# Altium PCB whirlygig.PcbDoc
Units mm, origin at the board's own origin, x right, y up, seen from the top; angles counter-clockwise.
Board outline 40 x 27.5 mm, 2 copper layers (Top Layer, Bottom Layer); 35 components, 48 nets, 275 pads, 46 vias.
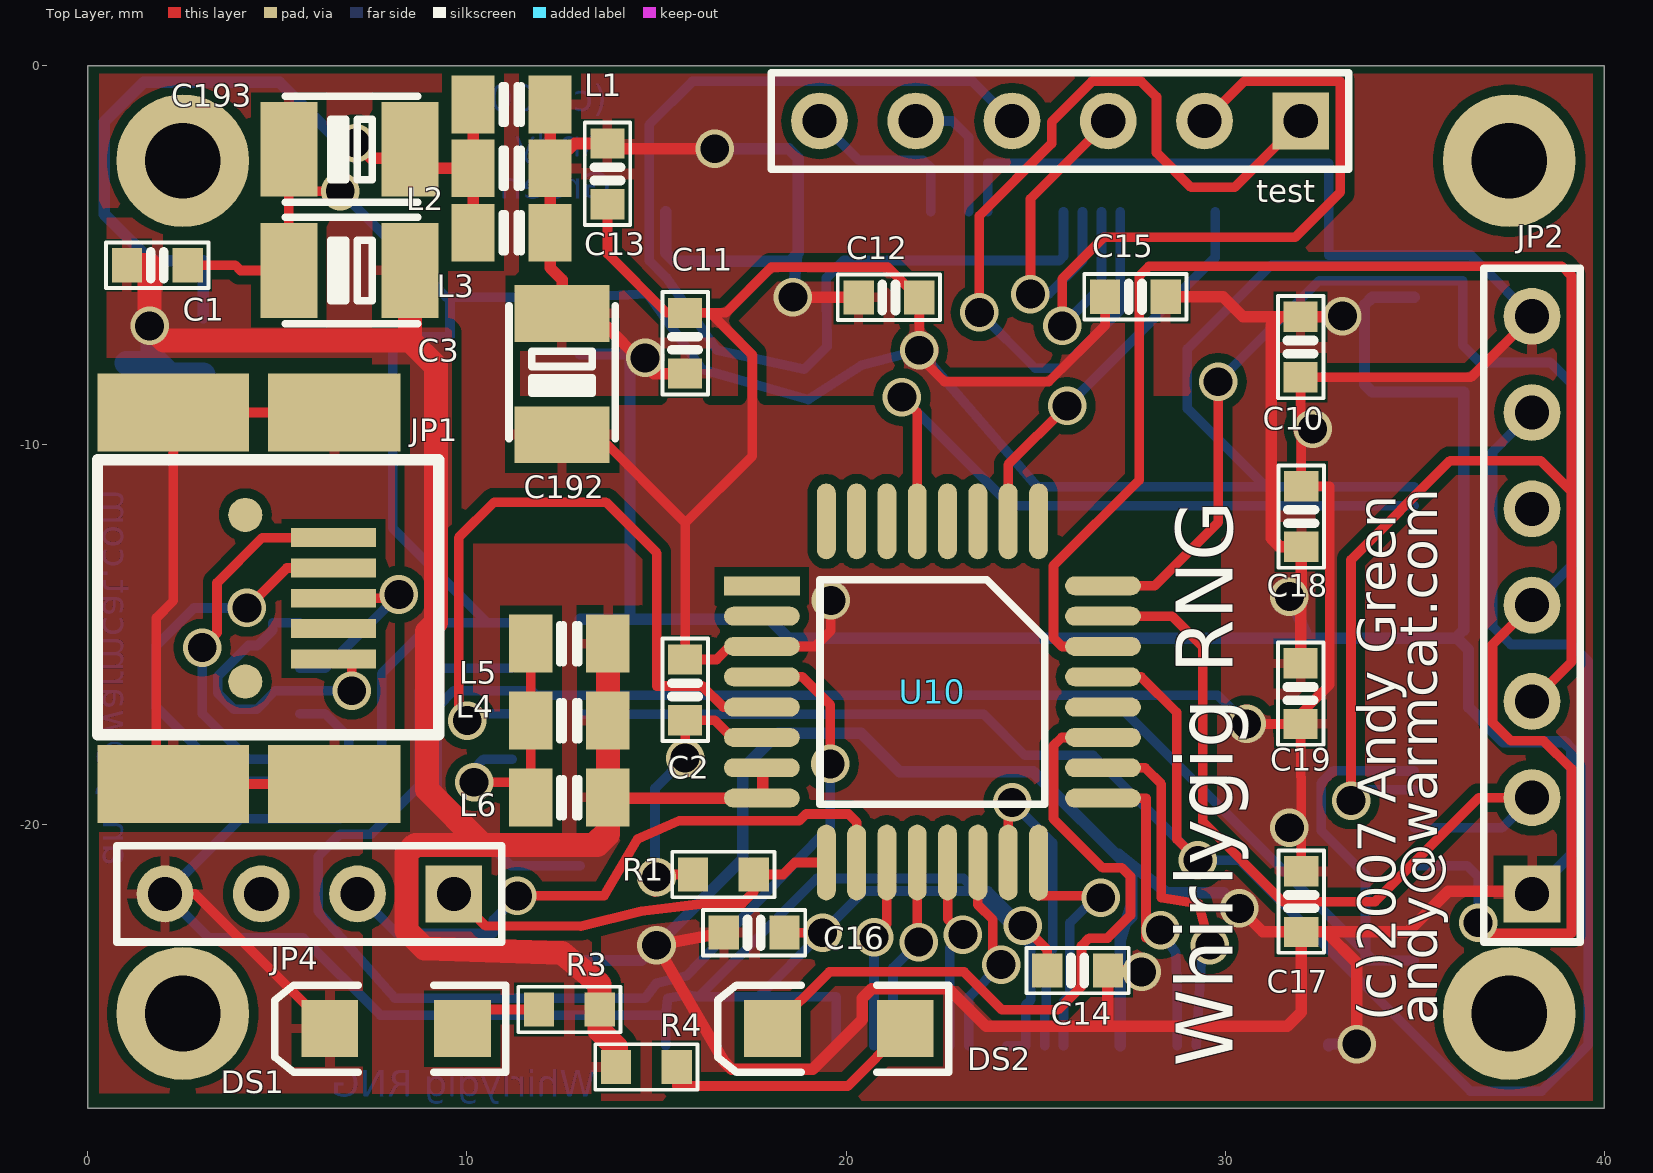
[diagram p0: Top Layer view]
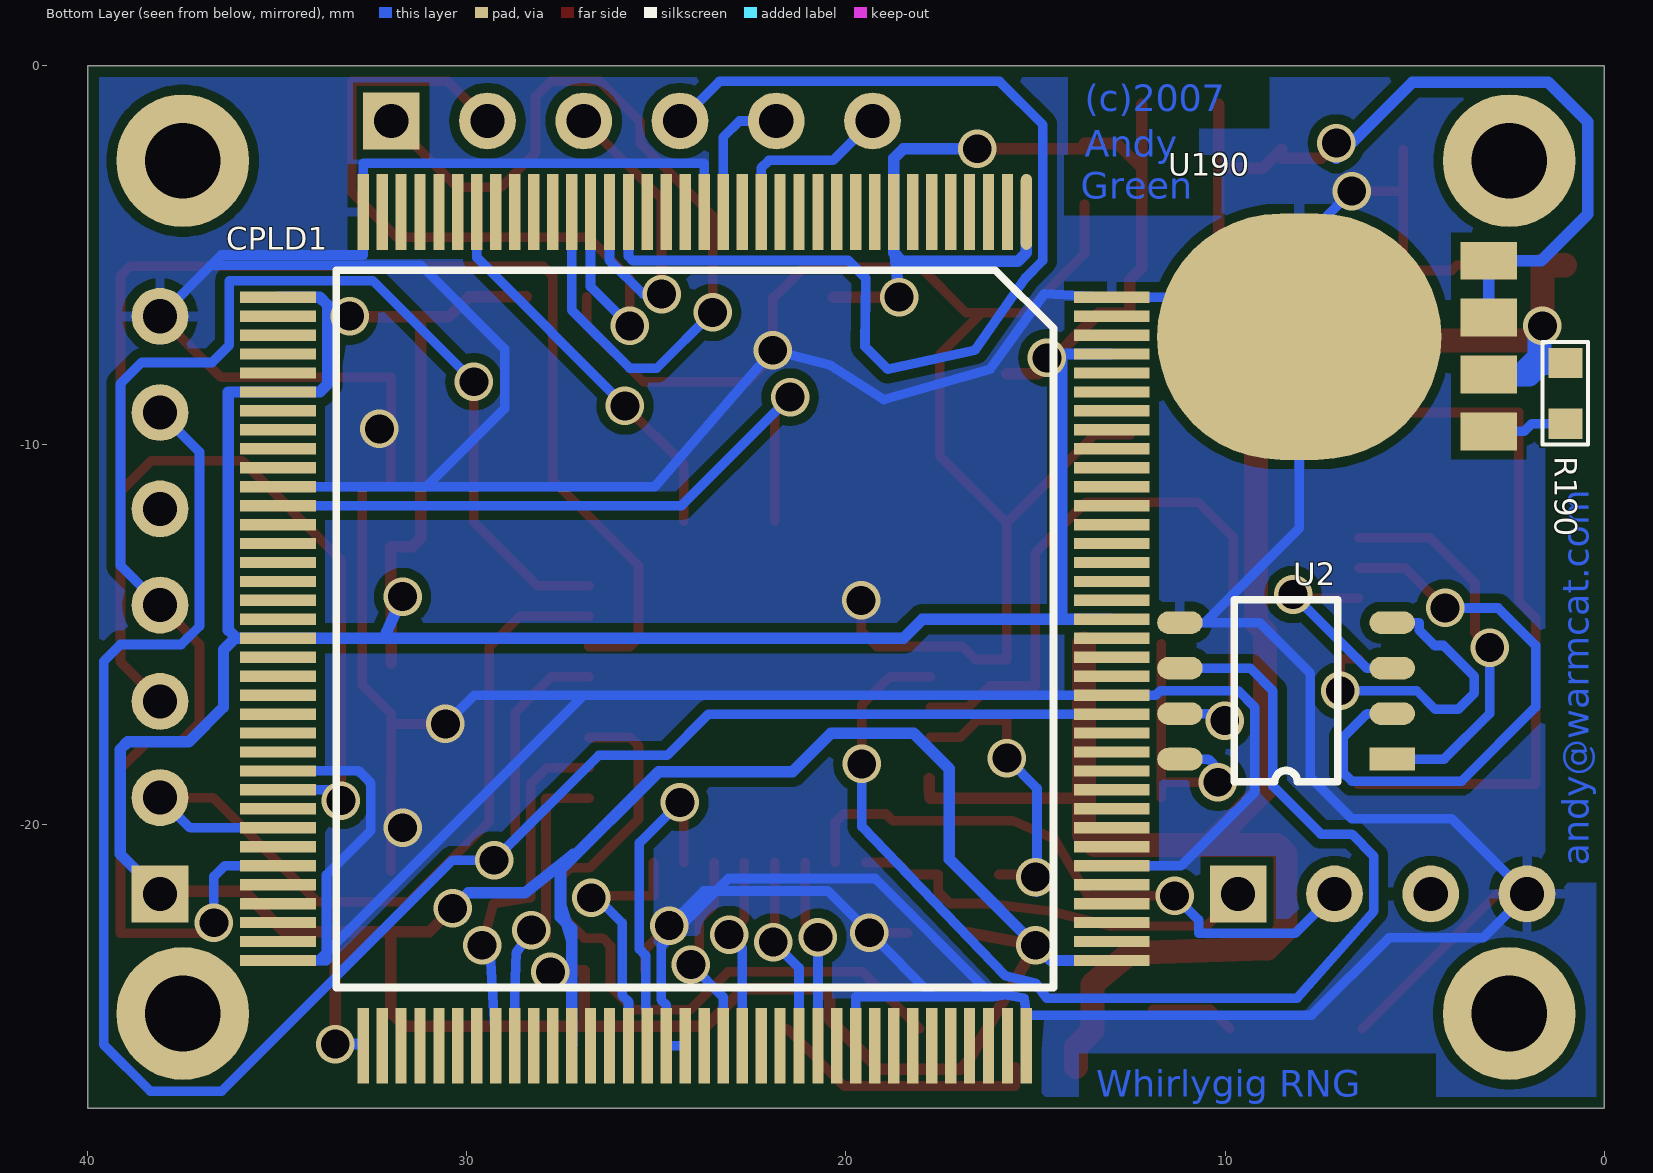
[diagram p1: Bottom Layer view, seen from below]

## Layer stack, top to bottom
Top Layer: signal copper 0.0356
Dielectric: dielectric 0.32, FR-4, Dk 4.8
Bottom Layer: signal copper 0.0356

## Board outline
0,-27.5 40,-27.5 40,0 0,0

## Design rules (kind name [scope] priority, off if disabled: settings)
Clearance Clearance_plane [(InPoly)] p1: gap=0.254
Clearance [All] p2: gap=0.152
ComponentClearance [All] p1: gap=0.152 collisioncheckmode=2 verticalgap=0.152
HoleSize [All] p1: absolutevalues=TRUE maxlimit=4 minlimit=0.025 maxpercent=80.000 minpercent=20.000
PolygonConnect [All] p1: connectstyle=Relief reliefconductorwidth=0.254 reliefentries=4 polygonreliefangle="90 Angle"
RoomDefinition randy [InComponentClass('randy')] p1: confinementstyle=ConfineIn formatcopy=TRUE lockcomponents=FALSE outline 0,-27.6 40.1,-27.6 40.1,0 0,0
RoutingVias [All] p1: holewidth=0.762 width=1.016 viastyle="Through Hole" minholewidth=0.762 minwidth=1.016 maxholewidth=0.762 maxwidth=1.016
SMDNeckDown [All] p1: percent=100.000
SolderMaskExpansion [All] p1: expansion=0.102
TestPointUsage [All] p1: valid=0 allowmultiple=FALSE
Testpoint [All] p1: side=15 testpointundercomponent=TRUE minsize=1.016 maxsize=2.54 preferedsize=1.524 minholesize=0 maxholesize=1.016 preferedholesize=0.813 testpointgrid=0.025 style=1023 order=0123456789
Width "Schematic Width Constraint" [InNet('3.3V')] p1: maxlimit=0.305 minlimit=0.152 preferedwidth=0.305
Width "Schematic Width Constraint_1" [InNet('3.3VBEFOREIND')] p2: maxlimit=0.305 minlimit=0.152 preferedwidth=0.305
Width "Schematic Width Constraint_2" [InNet('VBUSIN')] p3: maxlimit=0.635 minlimit=0.152 preferedwidth=0.635
Width [All] p4: maxlimit=0.254 minlimit=0.254 preferedwidth=0.254
16 further rules are at their usual default settings.

## Components (designator, comment, footprint, x,y, rotation, side; value= is the part's Value field where it differs from the comment)
C1 "100n" C0603 1.016,-5.25 r0 top
C2 "100n" C0603 15.748,-17.272 r90 top
C3 "10u" TAJ-T 6.9,-6.096 r180 top
C10 "100n" C0603 32.004,-6.604 r270 top
C11 "100n" C0603 15.748,-8.128 r90 top
C12 "100n" C0603 20.32,-6.096 r0 top
C13 "100n" C0603 13.716,-2.032 r270 top
C14 "100n" C0603 26.924,-23.876 r180 top
C15 "100n" C0603 28.448,-6.096 r180 top
C16 "100n" C0603 16.764,-22.86 r0 top
C17 "100n" C0603 32.004,-22.86 r90 top
C18 "100n" C0603 32.004,-12.7 r90 top
C19 "100n" C0603 32.004,-15.748 r270 top
C192 "47uF 6V3 TANT" TAJ-T 13.208,-8.128 r270 top
C193 "47uF 6V3 TANT" TAJ-T 6.9,-2.9 r180 top
CPLD1 "XC95288XLTQ144" TQFP144 15.24,-3.85 r270 bottom
DS1 "LED2" DSO-F2/D6.1 8.128,-25.4 r180 top
DS2 "LED2" DSO-F2/D6.1 19.812,-25.4 r180 top
JP1 "Header 9" USBSKT5MIN 2.25,-9.144 r0 top
JP2 "Header 7" HDR1X7 38.1,-21.844 r90 top
JP4 "Header 4" HDR1X4 9.652,-21.844 r180 top
L1 "742792093" C0805 11.176,-1.016 r180 top
L2 "742792093" C0805 11.176,-2.7 r180 top
L3 "742792093" C0805 11.176,-4.4 r180 top
L4 "742792093" C0805 12.7,-17.272 r0 top
L5 "742792093" C0805 12.7,-15.24 r0 top
L6 "742792093" C0805 12.7,-19.304 r0 top
R1 "10K" R0603 16.764,-21.336 r0 top
R3 "470R" R0603 12.7,-24.892 r180 top
R4 "330R" R0603 14.732,-26.416 r0 top
R190 "10K" R0603 1.016,-8.636 r90 bottom
test "HEADER 6" HDR1X6 32,-1.45 r180 top
U2 "USB6B1" SOP8USB 5.588,-18.288 r0 bottom
U10 "C8051F320" LQFP32 17.78,-13.716 r270 top
U190 "LP3964EMP-3.3" SOT-223-5 3.048,-9.652 r90 bottom

## Footprints (in the part's own frame and the unit in brackets; to place one, negate y for a bottom-side part, rotate by r counter-clockwise, add the part's x,y. Pads: shape width x height; smd on the part's side, far side on the other; paste and mask are expansions set on the pad)
C0603 [mm]
  rect 0.8x0.9 smd: 1(0.013,-0.008) 2(1.613,-0.008)
  silkscreen extent -0.54,-0.61 2.16,0.59
C0805 [mil]
  rect 45x60 smd: 1(-40,0) 2(40,0)
  silkscreen extent -10,-20 10,20
DSO-F2/D6.1 [mm] "SMT LED; 2 Flat Leads"
  rect 1.5x1.5 smd: 1(-1.75,0) 2(1.75,0)
  silkscreen extent -2.9,-1.15 3.2,1.15
HDR1X4 [mm] "Connector; Header; 4 Position"
  rect 1.5x1.5 hole 0.9: 1(0,0)
  round 1.5 hole 0.9: 2(2.54,0) 3(5.08,0) 4(7.62,0)
  silkscreen extent -1.27,-1.27 8.89,1.27
HDR1X6 [mm] "Connector; Header; 6 Position"
  rect 1.5x1.5 hole 0.9: 1(0,0)
  round 1.5 hole 0.9: 2(2.54,0) 3(5.08,0) 4(7.62,0) 5(10.16,0) 6(12.7,0)
  silkscreen extent -1.27,-1.27 13.97,1.27
HDR1X7 [mm] "Connector; Header; 7 Position"
  rect 1.5x1.5 hole 0.9: 1(0,0)
  round 1.5 hole 0.9: 2(2.54,0) 3(5.08,0) 4(7.62,0) 5(10.16,0) 6(12.7,0) 7(15.24,0)
  silkscreen extent -1.27,-1.27 16.51,1.27
LQFP32 [mm]
  rect 0.5x2 smd: 1(0,0)
  oval 0.5x2 smd: 2(0.8,0) 3(1.6,0) 4(2.4,0) 5(3.2,0) 6(4,0) 7(4.8,0) 8(5.6,0) 17(5.6,9) 18(4.8,9) 19(4,9) 20(3.2,9) 21(2.4,9) 22(1.6,9) 23(0.8,9) 24(0,9)
  oval 2x0.5 smd: 9(7.3,1.7) 10(7.3,2.5) 11(7.3,3.3) 12(7.3,4.1) 13(7.3,4.9) 14(7.3,5.7) 15(7.3,6.5) 16(7.3,7.3) 25(-1.7,7.3) 26(-1.7,6.5) 27(-1.7,5.7) 28(-1.7,4.9) 29(-1.7,4.1) 30(-1.7,3.3) 31(-1.7,2.5) 32(-1.7,1.7)
  silkscreen extent -0.16,1.54 5.77,7.47
R0603 [mm]
  rect 0.8x0.9 smd: 1(-0.8,0.003) 2(0.8,0.003)
  silkscreen extent -1.35,-0.6 1.35,0.6
SOP8USB [mm]
  rect 1.2x0.6 smd: 1(0,0)
  oval 1.2x0.6 smd: 2(0,-1.2) 3(0,-2.4) 4(0,-3.6) 5(5.6,-3.6) 6(5.6,-2.4) 7(5.6,-1.2) 8(5.6,0)
  silkscreen extent 1.43,-4.2 4.16,0.6
SOT-223-5 [mm]
  rect 1x1.5 smd: 1(0.013,-0.008) 2(1.513,-0.008) 3(3.013,-0.008) 4(4.513,-0.008)
  oval 6.5x7.5 smd: 5(2.513,4.992)
TAJ-T [mm]
  rect 1.5x2.5 smd: 1(-1.6,-0.7) 2(1.6,-0.7)
  silkscreen extent -1.8,-2.1 1.7,0.7
TQFP144 [mm]
  oval 2x0.3 smd: 1(0,0)
  rect 2x0.3 smd: 2(0,-0.5) 3(0,-1) 4(0,-1.5) 5(0,-2) 6(0,-2.5) 7(0,-3) 8(0,-3.5) 9(0,-4) 10(0,-4.5) 11(0,-5) 12(0,-5.5) 13(0,-6) 14(0,-6.5) 15(0,-7) 16(0,-7.5) 17(0,-8) 18(0,-8.5) 19(0,-9) 20(0,-9.5) 21(0,-10) 22(0,-10.5) 23(0,-11) 24(0,-11.5) 25(0,-12) 26(0,-12.5) 27(0,-13) 28(0,-13.5) 29(0,-14) 30(0,-14.5) 31(0,-15) 32(0,-15.5) 33(0,-16) 34(0,-16.5) 35(0,-17) 36(0,-17.5) 73(22,-17.5) 74(22,-17) 75(22,-16.5) 76(22,-16) 77(22,-15.5) 78(22,-15) 79(22,-14.5) 80(22,-14) 81(22,-13.5) 82(22,-13) 83(22,-12.5) 84(22,-12) 85(22,-11.5) 86(22,-11) 87(22,-10.5) 88(22,-10) 89(22,-9.5) 90(22,-9) 91(22,-8.5) 92(22,-8) 93(22,-7.5) 94(22,-7) 95(22,-6.5) 96(22,-6) 97(22,-5.5) 98(22,-5) 99(22,-4.5) 100(22,-4) 101(22,-3.5) 102(22,-3) 103(22,-2.5) 104(22,-2) 105(22,-1.5) 106(22,-1) 107(22,-0.5) 108(22,0)
  rect 0.3x2 smd: 37(2.25,-19.75) 38(2.75,-19.75) 39(3.25,-19.75) 40(3.75,-19.75) 41(4.25,-19.75) 42(4.75,-19.75) 43(5.25,-19.75) 44(5.75,-19.75) 45(6.25,-19.75) 46(6.75,-19.75) 47(7.25,-19.75) 48(7.75,-19.75) 49(8.25,-19.75) 50(8.75,-19.75) 51(9.25,-19.75) 52(9.75,-19.75) 53(10.25,-19.75) 54(10.75,-19.75) 55(11.25,-19.75) 56(11.75,-19.75) 57(12.25,-19.75) 58(12.75,-19.75) 59(13.25,-19.75) 60(13.75,-19.75) 61(14.25,-19.75) 62(14.75,-19.75) 63(15.25,-19.75) 64(15.75,-19.75) 65(16.25,-19.75) 66(16.75,-19.75) 67(17.25,-19.75) 68(17.75,-19.75) 69(18.25,-19.75) 70(18.75,-19.75) 71(19.25,-19.75) 72(19.75,-19.75) 109(19.75,2.25) 110(19.25,2.25) 111(18.75,2.25) 112(18.25,2.25) 113(17.75,2.25) 114(17.25,2.25) 115(16.75,2.25) 116(16.25,2.25) 117(15.75,2.25) 118(15.25,2.25) 119(14.75,2.25) 120(14.25,2.25) 121(13.75,2.25) 122(13.25,2.25) 123(12.75,2.25) 124(12.25,2.25) 125(11.75,2.25) 126(11.25,2.25) 127(10.75,2.25) 128(10.25,2.25) 129(9.75,2.25) 130(9.25,2.25) 131(8.75,2.25) 132(8.25,2.25) 133(7.75,2.25) 134(7.25,2.25) 135(6.75,2.25) 136(6.25,2.25) 137(5.75,2.25) 138(5.25,2.25) 139(4.75,2.25) 140(4.25,2.25) 141(3.75,2.25) 142(3.25,2.25) 143(2.75,2.25) 144(2.25,2.25)
  silkscreen extent 1.54,-18.21 20.46,0.72
USBSKT5MIN [mm]
  round 0.9 smd: 0(1.9,-7.1) 0(1.9,-2.7)
  rect 2.25x0.5 smd: 1(4.225,-3.3) 2(4.225,-4.1) 3(4.225,-4.9) 4(4.225,-5.7) 5(4.225,-6.5)
  rect 4x2.05 smd: 6(0,0) 8(0,-9.8)
  rect 3.5x2.05 smd: 7(4.25,0) 9(4.25,-9.8)
  silkscreen extent -2,-8.5 7,-1.25

## Part data
C1 C2 C10 C11 C12 C13 C14 C15 C16 C17 C18 C19: library part "100N DISK"
C3: library part "1UF TANT"
C192 C193: library part "Cap Pol3", "Polarized Capacitor (Surface Mount)"
DS1 DS2: "Typical RED, GREEN, YELLOW, AMBER GaAs LED"
JP1: "Header, 9-Pin"
JP2: "Header, 7-Pin"
JP4: "Header, 4-Pin"
L1 L2 L3 L4 L5 L6: library part Inductor, "Inductor"
R1: library part 100K, "Resistor"
R3 R4 R190: library part Res3, "Resistor"
U2: "USB Protection Diodes"
U10: library part Component_3, "Cygnal USB flash chip"
U190: library part LP3964

## Free pads (board coordinates)
  round 3.5 hole 2: 0(2.5,-25) 0(2.5,-2.5) 0(37.5,-25) 0(37.5,-2.5)

## Via types
v1: diameter 1.016, hole 0.762, Top Layer to Bottom Layer, 46 vias

## Nets (pads, with @x,y where several pads share a name; then routed paths per layer and width w, separated by ;. In a path a pad name is that pad's centre, name@x,y a point inside that pad or via, vN(x,y) a via of type N, cw(c..) or ccw(c..) an arc to the next point about the centre after c; other vN are vias at no path point)
3.3V: C10.1 C11.1 C12.1 C13.1 C14.1 C15.1 C16.1 C17.1 C18.1 C19.1 C192.1 CPLD1.1 CPLD1.8 CPLD1.37 CPLD1.42 CPLD1.55 CPLD1.73 CPLD1.84 CPLD1.109 CPLD1.127 CPLD1.141 JP2.1 L1.1 L2.1 L3.1 | length 165.2
  Top Layer w0.305: L1.1 L2.1 ; C11.1 14.922,-8.115 13.335,-6.528 C192.1 12.508,-5.639 12.192,-5.323 L3.1 L2.1 ; v1(16.535,-2.184) 13.708,-2.184 C13.1 12.847,-2.045 L2.1 ; C16.1 v1(15,-23.2) 16.777,-26.264 16.98,-26.467 19.126,-26.467 20.426,-25.167 20.426,-24.595 20.676,-24.345 22.704,-24.345 23.695,-25.336 31.644,-25.336 32.012,-24.968 C17.1 ; v1(18.6,-6.1) 19.05,-6.104 C12.1 ; 26.9,-25.336 26.911,-24.498 C14.1 v1@27.768,-23.868 ; C15.1 29.947,-6.088 30.475,-6.617 v1@33.083,-6.617 ; v1(30.378,-22.225) 31.001,-22.847 C17.1 ; 31.445,-6.617 31.217,-6.845 31.217,-12.459 31.445,-12.687 C18.1 32.012,-14.234 31.996,-14.249 C19.1 ; v1(33.477,-25.806) 33.477,-23.66 32.664,-22.847 ; JP2.1 37.502,-21.844 37.502,-21.777 35.89,-21.777 34.82,-22.847 32.664,-22.847 ; C17.1 32.664,-22.847
  Bottom Layer w0.3: CPLD1.109 14.602,-23.6 17.272,-20.93 ; CPLD1.127 14.3,-14.6 ; CPLD1.141 14.3,-7.6 14.3,-14.6 ; CPLD1.1 15.24,-4.928 15.469,-5.156 18.511,-5.156 18.74,-4.928 CPLD1.8 18.74,-2.438 18.486,-2.184 v1(16.535,-2.184) ; 17.983,-14.6 14.3,-14.6 ; 18.483,-15.1 32.194,-15.1 CPLD1.55 36.081,-15.1 ; v1(18.6,-6.1) 18.7,-5 ; CPLD1.84 27.24,-22.756 ; CPLD1.73 32.74,-25.806 v1(33.477,-25.806) ; CPLD1.37 33.884,-6.1 33.68,-6.303 33.68,-8.397 33.884,-8.6 CPLD1.42 36.297,-8.6 36.297,-14.884 36.081,-15.1 ; 37.338,-17.831 36.424,-16.916 36.424,-15.405 36.119,-15.1 36.081,-15.1
  Bottom Layer w0.305: 17.272,-20.93 17.272,-18.542 18.212,-17.602 20.396,-17.602 21.412,-18.618 24.943,-18.618 27.534,-21.209 27.534,-22.462 27.24,-22.756 ; 17.983,-14.6 18.483,-15.1 ; 27.2,-20.8 28.473,-21.819 29.972,-21.819 v1(30.378,-22.225) ; 27.24,-23.052 27.376,-22.62 27.508,-22.2 ; v1(31.7,-14) 32.194,-15.1 ; 37.338,-17.831 38.952,-17.831 39.155,-18.034 39.155,-20.789 JP2.1
  other v1: 27.8,-23.9 14.7,-7.7 33.1,-6.6
3.3VBEFOREIND: C193.1 L1.2 L2.2 L3.2 U190.3 U190.4 | length 22.5
  Top Layer w0.305: v1(7.061,-2.032) 7.468,-2.438 8.5,-2.438 C193.1 9,-2.7 L2.2 ; L3.2 L2.2 ; L1.2 L2.2
  Bottom Layer w0.305: U190.3 U190.4 1.66,-5.139 0.432,-3.912 0.432,-1.473 1.473,-0.432 5.055,-0.432 6.858,-2.235 7.061,-2.438 v1(7.061,-2.032)
3V: C2.1 R1.1 U10.6 | length 8.3
  Top Layer w0.254: v1@14.961,-21.793 15.421,-21.333 R1.1 ; v1(15.756,-18.263) C2.1 16.535,-17.259 16.992,-17.716 U10.6
  Bottom Layer w0.254: v1@14.961,-21.793 14.961,-19.058 v1(15.756,-18.263)
  other v1: 15,-21.4
C2CK: JP4.1 R1.2 U10.9 | length 11
  Top Layer w0.254: JP4.1 10.494,-22.686 13,-22.7 14.6,-22.3 16.268,-22.098 17.26,-22.098 17.564,-21.793 R1.2 18.339,-21.333 18.656,-21.016 U10.9
C2D: JP4.2 U10.10 | length 16.4
  Top Layer w0.254: v1(11.328,-21.895) 13.614,-21.895 14.5,-20.4 15.596,-19.914 18.771,-19.914 18.948,-19.736 20.066,-19.736 20.28,-19.95 U10.10
  Bottom Layer w0.254: JP4.2 8.153,-22.885 10.693,-22.885 10.693,-22.53 v1(11.328,-21.895)
CLOCK: CPLD1.30 U10.26 | length 10.4
  Top Layer w0.254: U10.26 24.28,-10.518 v1(25.832,-8.966)
  Bottom Layer w0.254: v1(25.832,-8.966) 29.74,-5.058 CPLD1.30
D+: U2.6 U10.4 | length 31.9
  Top Layer w0.254: U10.4 18.847,-16.116 19.583,-16.853 v1(19.583,-18.415)
  Bottom Layer w0.254: U2.6 9.334,-15.888 8.737,-16.485 8.737,-19 7.468,-20.269 6.655,-20.269 6.071,-20.853 6.071,-22.301 8.1,-24.6 14.7,-24.6 15,-24.2 15.8,-24 19.583,-20.066 v1(19.583,-18.415)
D-: U2.7 U10.5 | length 18.9
  Top Layer w0.254: v1(10.008,-17.272) 9.779,-17.043 9.779,-12.446 10.719,-11.506 13.665,-11.506 15.011,-12.852 15.011,-16.358 16.205,-16.358 16.764,-16.916 U10.5
  Bottom Layer w0.254: v1(10.008,-17.272) 10.192,-17.088 U2.7
GND: C1.2 C2.2 C3.2 C10.2 C11.2 C12.2 C13.2 C14.2 C15.2 C16.2 C17.2 C18.2 C19.2 C192.2 C193.2 CPLD1.18 CPLD1.36 CPLD1.47 CPLD1.62 CPLD1.72 CPLD1.89 CPLD1.90 CPLD1.99 CPLD1.108 CPLD1.114 CPLD1.123 CPLD1.144 DS1.2 JP2.7 JP4.4 U2.5 U10.3 U190.5 | length 257.5
  Top Layer w0.254: JP4.4 2.822,-21.844 DS1.2 ; C1.2 3.886,-5.258 4.024,-5.396 C3.2 C193.2@5.3,-3.302 ; C193.2 C193.2@5.3,-3.302 ; v1(6.655,-3.302) C193.2@5.3,-3.302 ; C192.2 13.437,-9.728 15.756,-12.047 15.756,-12.065 ; C13.2 13.708,-4.953 15.271,-6.515 C11.2 16.421,-6.515 ; C16.2 v1(19.38,-22.868) ; v1(19.6,-14.1) 19.6,-14.9 19.184,-15.316 16.93,-15.316 16.586,-15.659 C2.2 15.756,-12.065 ; v1(24.663,-22.682) 25.311,-23.33 C14.2 ; C15.2 26.835,-6.845 25.349,-8.331 22.593,-8.331 21.933,-7.671 21.933,-6.756 C12.2 21.895,-6.104 21.1,-5.309 18.034,-5.309 16.827,-6.515 16.421,-6.515 ; v1(30.569,-17.361) C19.2 ; C17.2 32.012,-18.769 31.996,-18.753 C19.2 ; JP2.7 36.487,-8.217 C10.2 31.996,-9.662 32.012,-9.677 C18.2 32.766,-11.087 32.766,-16.324 31.996,-17.094 C19.2 ; 15.756,-12.065 17.527,-10.293 17.527,-7.621 16.421,-6.515
  Bottom Layer w0.254: v1(6.655,-3.302) 9.266,-5.913 9.453,-6.1 U190.5@9.55,-6.1 ; U2.5 10.533,-14.688 ; CPLD1.114 11.151,-21.1 9.216,-19.166 9.216,-16.916 9.648,-16.485 11.709,-16.485 11.825,-16.6 CPLD1.123 26.912,-16.6 ; CPLD1.108 CPLD1.108@15.24,-25.044 ; CPLD1.99 19.74,-24.562 17.686,-24.562 ; CPLD1.18 23.74,-2.565 32.74,-2.565 CPLD1.36 32.74,-4.987 36.483,-4.987 36.754,-5.258 ; CPLD1.90 CPLD1.89 24.74,-24.777 24.879,-24.638 24.879,-23.216 24.504,-22.841 23.431,-21.768 ; v1(24.663,-22.682) 23.749,-21.768 23.431,-21.768 ; v1(30.569,-17.361) 29.808,-16.6 26.912,-16.6 ; CPLD1.72 33.912,-23.6 ; CPLD1.62 34.112,-18.6 34.105,-18.593 32.868,-18.593 32.537,-18.923 32.537,-20.175 33.706,-21.343 33.706,-23.393 ; CPLD1.47 31.064,-11.1 ; JP2.7 36.754,-5.258 ; U190.5@9.55,-6.1 CPLD1.144 14.761,-6.006 16.2,-8 19,-8.8 20.4,-7.9 v1(21.933,-7.5) 25.045,-11.1 31.064,-11.1 ; U190.5@9.55,-6.1 9.55,-7.139 U190.5 8.04,-12.195 10.533,-14.688 ; 10.533,-14.688 9.093,-14.688 7.747,-16.034 7.747,-18.771 6.655,-19.863 4.013,-19.863 JP4.4 3.193,-23.005 5.676,-23.005 7.715,-25.044 CPLD1.108@15.24,-25.044 ; CPLD1.108@15.24,-25.044 15.3,-24.6 15.8,-24.5 16.104,-24.562 ; 16.104,-24.562 19.228,-21.438 23.101,-21.438 23.431,-21.768 ; 16.104,-24.562 17.686,-24.562 ; 17.686,-24.562 v1(19.38,-22.868) 20.48,-21.768 23.431,-21.768 ; 26.912,-16.6 33.706,-23.393 ; 31.064,-11.1 29.007,-9.042 29.007,-7.468 31.217,-5.258 36.754,-5.258 ; 33.706,-23.393 33.912,-23.6 ; 33.706,-23.393 33.706,-23.6 33.912,-23.6
  other v1: 31.7,-20.1 32.312,-9.577
NetDS1_1: DS1.1 R3.2 | length 2.2
  Top Layer w0.254: DS1.1 10.383,-24.895 R3.2
NetDS2_1: DS2.1 R4.2 | length 7.2
  Top Layer w0.254: R4.2 15.532,-26.913 20.049,-26.913 DS2.1
NetJP1_1: JP1.1 U2.1 | length 10.2
  Top Layer w0.254: v1(3.014,-15.347) 3.404,-14.958 3.404,-13.638 4.597,-12.444 JP1.1
  Bottom Layer w0.254: v1(3.014,-15.347) 3.014,-17.086 4.216,-18.288 U2.1
NetJP1_2: JP1.2 U2.2 | length 15.6
  Top Layer w0.254: v1(4.191,-14.3) 5.247,-13.244 JP1.2
  Bottom Layer w0.254: v1(4.191,-14.3) 2.794,-14.3 1.803,-15.291 1.803,-16.916 3.759,-18.872 6.655,-18.872 6.883,-18.644 6.883,-17.723 6.248,-17.088 U2.2
NetJP1_3: JP1.3 U2.3 | length 5.2
  Top Layer w0.254: JP1.3 8.105,-14.044 v1(8.204,-13.945)
  Bottom Layer w0.254: U2.3 6.261,-15.888 v1(8.204,-13.945)
NetJP1_5: JP1.5 U2.4 | length 8.6
  Top Layer w0.254: JP1.5 6.96,-15.644 v1(6.96,-16.485)
  Bottom Layer w0.254: U2.4 4.877,-14.688 4.877,-14.884 4.47,-15.291 4.233,-15.291 3.421,-16.104 3.421,-16.546 3.848,-16.973 4.452,-16.973 4.941,-16.485 v1(6.96,-16.485)
NetR190_1: R190.1 U190.1 | length 2.1
  Bottom Layer w0.254: R190.1 1.905,-9.436 2.109,-9.639 U190.1
NLED: DS2.2 U10.19 | length 19.1
  Top Layer w0.254: DS2.2 19.561,-23.901 23.114,-23.901 24.117,-24.904 25.591,-24.904 26.213,-24.282 26.213,-23.216 26.416,-23.012 26.899,-23.012 27.508,-22.403 27.508,-21.387 27.28,-21.158 26.772,-21.158 25.476,-19.863 25.476,-17.932 25.693,-17.716 U10.19
P00: U10.2
P01: U10.1
P02: U10.32
P03: U10.31
P04: U10.30
P06: U10.28
P07: U10.27
P11: U10.25
P16: U10.20
P20: CPLD1.80 U10.18 | length 9.5
  Top Layer w0.254: U10.18 27.889,-18.516 28.321,-18.948 28.321,-21.946 29.3,-22.1 v1(29.6,-23.2)
  Bottom Layer w0.254: CPLD1.80 v1@29.4,-23.2
P21: CPLD1.81 U10.17 | length 8
  Top Layer w0.254: U10.17 27.915,-19.316 v1@27.915,-23
  Bottom Layer w0.254: v1(28.3,-22.8) 28.7,-23.4 28.74,-24.422 CPLD1.81
P22: CPLD1.87 U10.16 | length 6.9
  Top Layer w0.254: U10.16 25.08,-21.889 26.664,-21.889 v1(26.721,-21.946)
  Bottom Layer w0.254: CPLD1.87 25.74,-24.689 25.908,-24.521 25.908,-22.606 26.568,-21.946 v1(26.721,-21.946)
P23: CPLD1.88 U10.15 | length 8.6
  Top Layer w0.254: U10.15 24.28,-19.535 v1(24.384,-19.431)
  Bottom Layer w0.254: v1(24.384,-19.431) 25.451,-20.498 25.451,-23.298 25.285,-23.464 25.285,-24.859 25.24,-24.904 CPLD1.88
P24: CPLD1.92 U10.14 | length 5.4
  Top Layer w0.254: U10.14 23.48,-22.133 23.874,-22.526 23.874,-23.493 v1(24.091,-23.71)
  Bottom Layer w0.254: CPLD1.92 23.24,-24.562 v1(24.091,-23.71)
P25: CPLD1.93 U10.13 | length 5.1
  Top Layer w0.254: U10.13 22.68,-22.514 v1(23.086,-22.92)
  Bottom Layer w0.254: CPLD1.93 22.74,-23.266 v1(23.086,-22.92)
P26: CPLD1.96 U10.12 | length 5.1
  Top Layer w0.254: U10.12 21.88,-23.074 v1(21.92,-23.114)
  Bottom Layer w0.254: CPLD1.96 21.24,-23.794 v1(21.92,-23.114)
P27: CPLD1.97 U10.11 | length 5
  Top Layer w0.254: v1(20.74,-22.987) 21.08,-22.647 U10.11
  Bottom Layer w0.254: CPLD1.97 v1(20.74,-22.987)
PJTAGTCK: CPLD1.67 JP2.4 U10.24 | length 42.3
  Top Layer w0.254: U10.24 28.143,-13.716 29.82,-12.04 v1(29.82,-8.331) ; v1(36.678,-22.606) 36.957,-22.885 39.141,-22.885 39.141,-18.542 38.405,-17.805 37.541,-17.805 37.059,-17.323 37.059,-15.265 JP2.4
  Bottom Layer w0.254: v1(29.82,-8.331) 32.487,-5.664 36.271,-5.664 36.271,-7.366 36.728,-7.823 38.583,-7.823 39.141,-8.382 39.141,-13.183 JP2.4 ; CPLD1.67 36.391,-21.1 36.678,-21.387 v1(36.678,-22.606)
PJTAGTDI: CPLD1.63 JP2.3 U10.22 | length 50.5
  Top Layer w0.254: U10.22 25.705,-15.316 25.476,-15.088 25.476,-13.183 27.737,-10.922 27.737,-5.537 27.991,-5.283 38.887,-5.283 39.141,-5.537 39.141,-11.227 ; v1(33.325,-19.38) 33.325,-13.03 35.941,-10.414 38.329,-10.414 39.141,-11.227 ; JP2.3 39.141,-15.723 39.141,-11.227
  Bottom Layer w0.254: v1(33.325,-19.38) 33.605,-19.1 CPLD1.63
PJTAGTDO: CPLD1.122 JP2.6 U10.21 | length 56.8
  Top Layer w0.254: U10.21 27.788,-16.116 28.727,-17.056 28.727,-20.396 v1(29.286,-20.955)
  Bottom Layer w0.254: CPLD1.122 23.628,-17.1 24.714,-18.186 26.518,-18.186 v1(29.286,-20.955) 30.378,-20.955 36.474,-27.051 38.354,-27.051 39.587,-25.818 39.587,-15.711 39.141,-15.265 37.541,-15.265 37.059,-14.783 37.059,-10.185 JP2.6
PJTAGTMS: CPLD1.65 JP2.2 U10.23 | length 21.7
  Top Layer w0.254: U10.23 28.6,-14.516 29.413,-15.329 29.413,-19.939 31.521,-22.047 33.96,-22.047 36.703,-19.304 JP2.2
  Bottom Layer w0.254: CPLD1.65 37.304,-20.1 JP2.2
PSERIALTOCPU: CPLD1.48 U10.29 | length 18.1
  Top Layer w0.254: v1(21.474,-8.738) 21.88,-9.144 U10.29
  Bottom Layer w0.254: v1(21.474,-8.738) 24.336,-11.6 CPLD1.48
PT1: CPLD1.25 test.1 | length 23.1
  Top Layer w0.254: v1(23.52,-6.502) 23.52,-3.952 25.425,-2.047 25.425,-1.473 26.492,-0.406 27.788,-0.406 28.194,-0.813 28.194,-2.286 29.108,-3.2 30.25,-3.2 test.1
  Bottom Layer w0.254: v1(23.52,-6.502) 24.994,-7.976 25.705,-7.976 27.24,-6.44 CPLD1.25
PT2: CPLD1.24 test.2 | length 19.9
  Top Layer w0.254: v1(25.705,-6.858) 25.705,-5.615 26.798,-4.521 31.852,-4.521 33.045,-3.327 33.045,-0.406 30.504,-0.406 test.2
  Bottom Layer w0.254: v1(25.705,-6.858) 26.74,-5.823 CPLD1.24
PT3: CPLD1.23 test.3 | length 8.4
  Top Layer w0.254: v1(24.867,-6.018) 24.867,-3.503 test.3
  Bottom Layer w0.254: v1(24.867,-6.018) 25.349,-6.018 26.24,-5.127 CPLD1.23
PT4: CPLD1.22 test.4 | length 29.7
  Bottom Layer w0.254: test.4 23.336,-0.406 15.951,-0.406 14.808,-1.549 14.808,-5.131 15.265,-5.588 16.6,-7.5 18.9,-8 19.5,-7.4 19.482,-5.588 19.939,-5.131 25.629,-5.131 25.74,-5.019 CPLD1.22
PT5: CPLD1.17 test.5 | length 3.5
  Bottom Layer w0.254: test.5 22.81,-1.45 23.24,-1.88 CPLD1.17
PT6: CPLD1.15 test.6 | length 4.6
  Bottom Layer w0.254: test.6 20.339,-2.489 22.037,-2.489 22.24,-2.692 CPLD1.15
SHIELD: JP1.6 JP1.7 JP1.8 JP1.9 | length 18.9
  Top Layer w0.254: JP1.9 JP1.8 1.803,-18.944 1.803,-14.56 2.25,-14.113 JP1.6 JP1.7
VBUSIN: C1.1 C3.1 L4.2 L5.2 L6.2 R3.1 R4.1 R190.2 U10.7 U10.8 U190.2 | length 54.8
  Top Layer w0.3: L6.2@13.716,-19.316 U10.8 17.8,-19.1 17.8,-18.8
  Top Layer w0.635: C1.1 1.626,-5.258 v1(1.626,-6.858) 2.007,-7.239 8.5,-7.239 ; C3.1 8.5,-7.239 ; 10.4,-20.549 8.941,-19.089 8.941,-14.922 9.182,-14.681 9.182,-7.921 8.5,-7.239 ; 13.348,-20.549 13.716,-20.18 ; L5.2 L4.2 L6.2 13.716,-19.316 13.716,-20.27 13.437,-20.549 8.636,-20.549 8.407,-20.777 8.407,-22.809 8.881,-23.283 12.5,-23.4 13.5,-24.232 R3.1 13.5,-25.45 13.932,-25.883 R4.1
  Bottom Layer w0.635: R190.2 1.854,-7.836 2.158,-8.139 ; v1(1.626,-6.858) 1.702,-6.934 1.702,-7.86 1.981,-8.139 U190.2
VCCPOSTIND: L4.1 L5.1 L6.1 U2.8 | length 7
  Top Layer w0.254: v1(10.185,-18.898) L6.1@11.684,-18.898 ; L6.1 L6.1@11.684,-18.898 ; L5.1 L4.1 L6.1@11.684,-18.898
  Bottom Layer w0.254: v1(10.185,-18.898) 10.185,-18.542 10.439,-18.288 U2.8
pads on no net: CPLD1.2 CPLD1.3 CPLD1.4 CPLD1.5 CPLD1.6 CPLD1.7 CPLD1.9 CPLD1.10 CPLD1.11 CPLD1.12 CPLD1.13 CPLD1.14 CPLD1.16 CPLD1.19 CPLD1.20 CPLD1.21 CPLD1.26 CPLD1.27 CPLD1.28 CPLD1.29 CPLD1.31 CPLD1.32 CPLD1.33 CPLD1.34 CPLD1.35 CPLD1.38 CPLD1.39 CPLD1.40 CPLD1.41 CPLD1.43 CPLD1.44 CPLD1.45 CPLD1.46 CPLD1.49 CPLD1.50 CPLD1.51 CPLD1.52 CPLD1.53 CPLD1.54 CPLD1.56 CPLD1.57 CPLD1.58 CPLD1.59 CPLD1.60 CPLD1.61 CPLD1.64 CPLD1.66 CPLD1.68 CPLD1.69 CPLD1.70 CPLD1.71 CPLD1.74 CPLD1.75 CPLD1.76 CPLD1.77 CPLD1.78 CPLD1.79 CPLD1.82 CPLD1.83 CPLD1.85 CPLD1.86 CPLD1.91 CPLD1.94 CPLD1.95 CPLD1.98 CPLD1.100 CPLD1.101 CPLD1.102 CPLD1.103 CPLD1.104 CPLD1.105 CPLD1.106 CPLD1.107 CPLD1.110 CPLD1.111 CPLD1.112 CPLD1.113 CPLD1.115 CPLD1.116 CPLD1.117 CPLD1.118 CPLD1.119 CPLD1.120 CPLD1.121 CPLD1.124 CPLD1.125 CPLD1.126 CPLD1.128 CPLD1.129 CPLD1.130 CPLD1.131 CPLD1.132 CPLD1.133 CPLD1.134 CPLD1.135 CPLD1.136 CPLD1.137 CPLD1.138 CPLD1.139 CPLD1.140 CPLD1.142 CPLD1.143 JP1.0 JP1.4 JP2.5 JP4.3

## Polygon pours and split planes (outlines as drawn)
GND on Top Layer (solid, remove dead copper): 0.3,-0.4 0.3,-27.1 39.7,-27.1 39.7,-0.2 0.3,-0.2
VBUSIN on Top Layer (solid, remove dead copper): 0.5,-4 9.6,-4 9.6,-12.6 15.011,-12.6 15.011,-27.117 7.5,-27.117 7.5,-7.7 0.5,-7.7
SHIELD on Top Layer (solid, remove dead copper): 0.1,-8.2 8.1,-8.2 8.1,-19.8 0.2,-19.8
3.3V on Top Layer (solid, remove dead copper): 11.4,-0.2 11.4,-8.7 29.9,-8.7 29.9,-21.5 13.547,-21.5 13.547,-27.3 39.7,-27.3 39.7,-0.2
GND on Bottom Layer (solid, remove dead copper): 0.2,-0.3 39.7,-0.3 39.7,-27.2 0.2,-27.2

## Other copper
Bottom Layer:
  text "(c)2007" at 13.7,-1.2 h0.7
  text "Andy" at 13.7,-2.4 h0.7
  text "Green" at 13.8,-3.5 h0.7
  text "andy@warmcat.com" at 0.4,-21.1 h0.7 r270
  text "Whirlygig RNG" at 13.4,-27.2 h0.7

## Silkscreen, mask and mechanical layers (free items; w line width, h text height)
Top Overlay:
  text "(c)2007 Andy Green" at 34.5,-25.2 h1 r90
  text "andy@warmcat.com" at 35.6,-25.3 h1 r90
  text "Whirlygig RNG" at 30.2,-26.4 h1.5 r90
Mechanical 1:
  lines w0.1: -1.6,-27.5 0.8,-27.5 ; -1.6,0 1.6,0 ; 0,-29.3 0,-25.2 ; 0,-2.6 0,2.1 ; 38.3,0 41.5,0 ; 38.6,-27.5 41.5,-27.5 ; 40,-28.8 40,-25.7 ; 40,-1.6 40,2